# EAGLE board bot4layer (EAGLE 7.6.0)
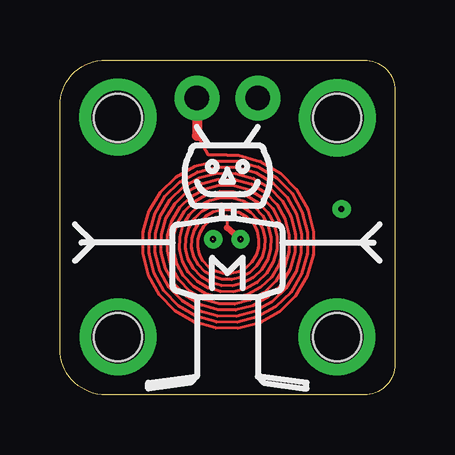
[diagram p0: board, top side]
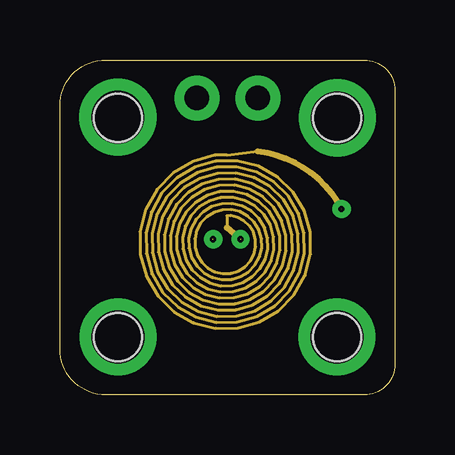
[diagram p1: board, inner layer Route2]
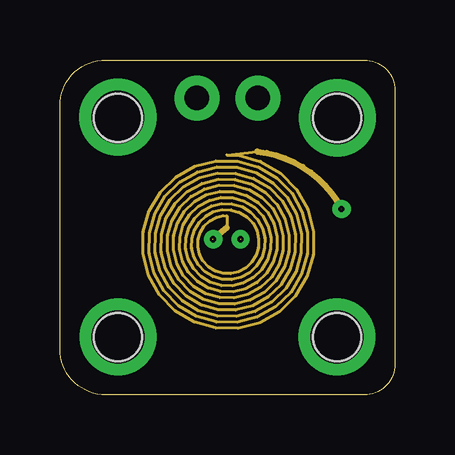
[diagram p2: board, inner layer Route3]
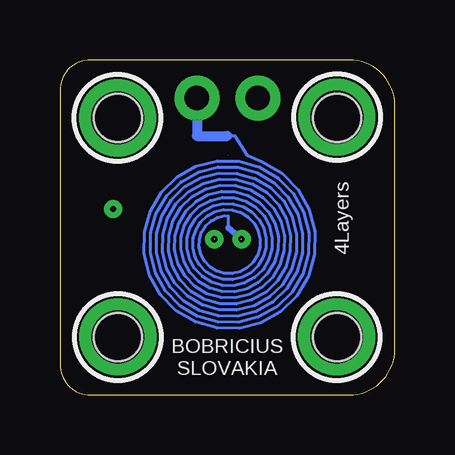
[diagram p3: board, bottom side, seen from below]

Size 13.97 x 13.97 mm. Coordinates in mm from the lower left corner, seen from the top.
Outline: 1.9,0 arc-90 0,1.91 0,12.06 arc-90 1.9,13.97 12.7,13.97 arc-90 13.97,12.7 13.97,1.27 arc-90 12.7,0 1.9,0
Copper layers (1+2+3+16): Top 0.0356mm / dielectric 1.5011mm / Route2 0.0356mm / dielectric 0.1499mm / Route3 0.0356mm / dielectric 0.2007mm / Bottom 0.0356mm
Design rules "LaenPCBOrder *": minimum track width 6mil, minimum drill 13mil, track to track 6mil, track to pad 6mil, pad to pad 6mil, via to via 6mil, smd to smd 6mil, copper to edge 15mil, drill to drill 6mil, minimum pad ring 7mil, minimum via ring 7mil, stop-mask expansion 4mil, vias tented up to drill 300mil, thermal gap 10mil
Net classes: 0 default: width 0.381 mm, drill 0.381 mm, clearance 0.305 mm; 1 GND: width 0.508 mm, drill 0.381 mm, clearance 0.305 mm; 2 pwr: width 0.508 mm, drill 0.381 mm, clearance 0.305 mm
Holes 2 mm at 2.41,2.41 2.41,11.56 11.56,2.41 11.56,11.56

## Footprints (pad centres in the part's own frame; a part is rotated, then mirrored left to right if it is on the bottom)
1X02_NO_SILK = drill 1.016 pad 1.88: 1 0,0; 2 2.54,0
MOUNTINGHOLE_2.0_PLATED = drill 2.2 pad 3: P$1 0,0

## Placement (x,y rotation side)
J1  [1X02_NO_SILK]  8.26,12.38 180 top
U$1  MOUNTINGHOLE2.0  [MOUNTINGHOLE_2.0_PLATED]  2.41,11.58 90 bottom
U$2  MOUNTINGHOLE2.0  [MOUNTINGHOLE_2.0_PLATED]  11.57,11.56 90 bottom
U$3  MOUNTINGHOLE2.0  [MOUNTINGHOLE_2.0_PLATED]  11.56,2.41 90 bottom
U$7  MOUNTINGHOLE2.0  [MOUNTINGHOLE_2.0_PLATED]  2.43,2.41 90 bottom

## Library data of the parts
J1 = SparkFun-Connectors
U$1-U$3 U$7 = microbuilder; BOM: EXCLUDE

## Nets
L4: J1.1 J1.2

## Tracks (layer width: path | path; a pad name or v marks a point on that pad's centre or on a via)
L4  (via drill 0.25 pad 0.76)  (6 unrouted)
  Top 0.127: 6.96,6.98 6.96,7.46 6.81,7.47 6.51,7.4 6.24,7.26 6.02,7.05 5.85,6.79 5.76,6.49 5.75,6.17 5.82,5.86 5.98,5.58 6.2,5.34 6.48,5.17 6.79,5.07 7.13,5.06 7.45,5.14 7.75,5.3 8,5.53 8.18,5.82 8.28,6.16 8.29,6.5 8.21,6.85 8.04,7.16 7.8,7.42 7.49,7.61 7.14,7.72 6.77,7.73 6.41,7.64 6.09,7.46 5.82,7.21 5.62,6.88 5.51,6.52 5.5,6.14 5.59,5.76 5.77,5.42 6.04,5.14 6.38,4.93 6.76,4.82 7.16,4.81 7.55,4.9 7.91,5.09 8.2,5.37 8.42,5.73 8.54,6.12 8.54,6.54 8.45,6.95 8.24,7.32 7.95,7.62 7.59,7.85 7.17,7.97 6.74,7.98 6.32,7.88 5.93,7.67 5.61,7.36 5.38,6.98 5.26,6.55 5.24,6.1 5.35,5.66 5.57,5.26 5.89,4.93 6.28,4.69 6.73,4.56 7.19,4.55 7.65,4.66 8.06,4.89 8.41,5.22 8.65,5.63 8.79,6.09 8.8,6.57 8.68,7.04 8.45,7.47 8.11,7.83 7.68,8.08 7.21,8.22 6.71,8.23 6.22,8.11 5.78,7.87 5.41,7.52 5.14,7.08 5,6.59 4.99,6.07 5.12,5.56 5.37,5.11 5.73,4.73 6.18,4.45 6.69,4.31 7.23,4.3 7.75,4.43 8.22,4.69 8.61,5.06 8.89,5.53 9.04,6.05 9.05,6.61 8.92,7.14 8.65,7.63 8.26,8.03 7.78,8.32 7.24,8.48 6.67,8.49 6.12,8.35 5.62,8.07 5.21,7.67 4.91,7.18 4.75,6.62 4.74,6.04 4.88,5.47 5.16,4.95 5.57,4.53 6.09,4.22 6.66,4.05 7.26,4.04 7.84,4.19 8.37,4.48 8.81,4.91 9.13,5.43 9.3,6.02 9.31,6.64 9.16,7.24 8.85,7.78 8.42,8.23 7.88,8.56 7.27,8.73 6.64,8.74 6.02,8.59 5.46,8.28 5,7.83 4.67,7.28 4.49,6.65 4.48,6 4.64,5.37 4.96,4.8 5.42,4.32 5.99,3.98 6.63,3.8 7.29,3.79 7.94,3.95 8.53,4.28 9.02,4.75 9.36,5.33 9.55,5.99 9.56,6.67 9.39,7.34 9.06,7.94 8.58,8.44 7.98,8.79 7.31,8.98 6.61,9 5.93,8.82 5.31,8.48 4.8,7.99 4.43,7.37 4.24,6.69 4.23,5.97 4.4,5.27 4.76,4.64 5.26,4.12 5.89,3.75 6.59,3.55 7.33,3.53 8.04,3.72 8.69,4.08 9.22,4.59 9.6,5.23 9.8,5.95 9.82,6.7 9.63,7.44 9.26,8.1 8.73,8.64 8.08,9.03 7.34,9.24 6.57,9.25 5.83,9.06 5.15,8.68 4.6,8.14 4.2,7.47 3.98,6.72 3.98,5.94 4.17,5.17 4.55,4.48 5.11,3.92 5.79,3.51 6.56,3.29 7.36,3.28 8.14,3.48 8.84,3.87 9.42,4.44 9.84,5.14 10.06,5.92 10.07,6.74 9.87,7.53 9.46,8.25 8.89,8.84 8.18,9.27 7.37,9.49 6.54,9.5 5.73,9.3 5,8.89 4.39,8.3 3.96,7.57 3.73,6.75 3.72,5.9 3.93,5.08 4.35,4.33 4.95,3.71 5.69,3.27 6.52,3.04 7.39,3.03 8.24,3.24 9,3.67 9.63,4.28 10.07,5.04 10.31,5.89 10.32,6.77 10.1,7.63 9.67,8.41 9.04,9.05 8.27,9.5 7.41,9.75 6.51,9.76 5.63,9.53 4.84,9.09 4.19,8.45 3.72,7.67 3.48,6.79 3.47,5.87 3.7,4.98 4.15,4.17 4.79,3.51 5.59,3.03 6.49,2.78 7.43,2.77 8.34,3.01 9.15,3.47 9.83,4.13 10.31,4.94 10.57,5.85 10.58,6.81 10.34,7.73 9.87,8.56 9.2,9.25 8.37,9.74 7.44,10 6.96,10.01 6.2,10.01 5.75,10.79 5.71,10.8
  Top 0.254: 6.96,6.98 v7.53,6.49
  Top 0.406: J1.2 5.71,10.8
  Route2 0.127: 6.96,6.98 6.96,7.46 7.11,7.47 7.4,7.4 7.67,7.26 7.9,7.05 8.06,6.79 8.15,6.49 8.16,6.17 8.09,5.86 7.94,5.58 7.72,5.34 7.44,5.17 7.12,5.07 6.79,5.06 6.46,5.14 6.17,5.3 5.92,5.53 5.74,5.82 5.64,6.16 5.63,6.5 5.71,6.85 5.87,7.16 6.12,7.42 6.43,7.61 6.78,7.72 7.14,7.73 7.5,7.64 7.83,7.46 8.1,7.21 8.3,6.88 8.41,6.52 8.42,6.14 8.33,5.76 8.14,5.42 7.87,5.14 7.54,4.93 7.16,4.82 6.76,4.81 6.37,4.9 6.01,5.09 5.71,5.37 5.5,5.73 5.38,6.12 5.37,6.54 5.47,6.95 5.67,7.32 5.96,7.62 6.33,7.85 6.74,7.97 7.18,7.98 7.6,7.88 7.98,7.67 8.3,7.36 8.54,6.98 8.66,6.55 8.67,6.1 8.57,5.66 8.35,5.26 8.03,4.93 7.64,4.69 7.19,4.56 6.73,4.55 6.27,4.66 5.85,4.89 5.51,5.22 5.26,5.63 5.13,6.09 5.12,6.57 5.23,7.04 5.47,7.47 5.81,7.83 6.23,8.08 6.71,8.22 7.21,8.23 7.7,8.11 8.14,7.87 8.51,7.52 8.77,7.08 8.92,6.59 8.93,6.07 8.8,5.56 8.55,5.11 8.19,4.73 7.73,4.45 7.23,4.31 6.69,4.3 6.17,4.43 5.7,4.69 5.31,5.06 5.03,5.53 4.87,6.05 4.86,6.61 5,7.14 5.26,7.63 5.65,8.03 6.13,8.32 6.68,8.48 7.24,8.49 7.8,8.35 8.3,8.07 8.71,7.67 9.01,7.18 9.17,6.62 9.18,6.04 9.04,5.47 8.75,4.95 8.34,4.53 7.83,4.22 7.26,4.05 6.66,4.04 6.07,4.19 5.54,4.48 5.1,4.91 4.79,5.43 4.62,6.02 4.61,6.64 4.76,7.24 5.06,7.78 5.5,8.23 6.04,8.56 6.64,8.73 7.28,8.74 7.89,8.59 8.45,8.28 8.91,7.83 9.25,7.28 9.42,6.65 9.43,6 9.28,5.37 8.96,4.8 8.5,4.32 7.93,3.98 7.29,3.8 6.62,3.79 5.97,3.95 5.39,4.28 4.9,4.75 4.55,5.33 4.37,5.99 4.36,6.67 4.52,7.34 4.86,7.94 5.34,8.44 5.94,8.79 6.61,8.98 7.31,9 7.99,8.82 8.61,8.48 9.12,7.99 9.48,7.37 9.68,6.69 9.69,5.97 9.51,5.27 9.16,4.64 8.65,4.12 8.03,3.75 7.32,3.55 6.59,3.53 5.88,3.72 5.23,4.08 4.7,4.59 4.32,5.23 4.11,5.95 4.1,6.7 4.29,7.44 4.65,8.1 5.18,8.64 5.84,9.03 6.57,9.24 7.34,9.25 8.09,9.06 8.76,8.68 9.32,8.14 9.72,7.47 9.93,6.72 9.94,5.94 9.75,5.17 9.36,4.48 8.81,3.92 8.13,3.51 7.36,3.29 6.56,3.28 5.78,3.48 5.07,3.87 4.49,4.44 4.08,5.14 3.86,5.92 3.85,6.74 4.05,7.53 4.45,8.25 5.03,8.84 5.74,9.27 6.54,9.49 7.38,9.5 8.19,9.3 8.92,8.89 9.52,8.3 9.96,7.57 10.19,6.75 10.2,5.9 9.99,5.08 9.57,4.33 8.97,3.71 8.23,3.27 7.39,3.04 6.52,3.03 5.68,3.24 4.92,3.67 4.29,4.28 3.84,5.04 3.6,5.89 3.59,6.77 3.81,7.63 4.25,8.41 4.87,9.05 5.64,9.5 6.51,9.75 7.41,9.76 8.29,9.53 9.08,9.09 9.73,8.45 10.19,7.67 10.44,6.79 10.45,5.87 10.22,4.98 9.77,4.17 9.12,3.51 8.32,3.03 7.43,2.78 6.49,2.77 5.58,3.01 4.76,3.47 4.09,4.13 3.61,4.94 3.35,5.85 3.34,6.81 3.58,7.73 4.05,8.56 4.72,9.25 5.54,9.74 6.48,10 6.96,10.01 8.26,10.16
  Route2 0.254: 6.96,6.98 v7.53,6.49 | 8.26,10.16 arc-56 v11.75,7.75
  Route3 0.127: 6.96,6.98 6.96,7.46 6.81,7.47 6.51,7.4 6.24,7.26 6.02,7.05 5.85,6.79 5.76,6.49 5.75,6.17 5.82,5.86 5.98,5.58 6.2,5.34 6.48,5.17 6.79,5.07 7.13,5.06 7.45,5.14 7.75,5.3 8,5.53 8.18,5.82 8.28,6.16 8.29,6.5 8.21,6.85 8.04,7.16 7.8,7.42 7.49,7.61 7.14,7.72 6.77,7.73 6.41,7.64 6.09,7.46 5.82,7.21 5.62,6.88 5.51,6.52 5.5,6.14 5.59,5.76 5.77,5.42 6.04,5.14 6.38,4.93 6.76,4.82 7.16,4.81 7.55,4.9 7.91,5.09 8.2,5.37 8.42,5.73 8.54,6.12 8.54,6.54 8.45,6.95 8.24,7.32 7.95,7.62 7.59,7.85 7.17,7.97 6.74,7.98 6.32,7.88 5.93,7.67 5.61,7.36 5.38,6.98 5.26,6.55 5.24,6.1 5.35,5.66 5.57,5.26 5.89,4.93 6.28,4.69 6.73,4.56 7.19,4.55 7.65,4.66 8.06,4.89 8.41,5.22 8.65,5.63 8.79,6.09 8.8,6.57 8.68,7.04 8.45,7.47 8.11,7.83 7.68,8.08 7.21,8.22 6.71,8.23 6.22,8.11 5.78,7.87 5.41,7.52 5.14,7.08 5,6.59 4.99,6.07 5.12,5.56 5.37,5.11 5.73,4.73 6.18,4.45 6.69,4.31 7.23,4.3 7.75,4.43 8.22,4.69 8.61,5.06 8.89,5.53 9.04,6.05 9.05,6.61 8.92,7.14 8.65,7.63 8.26,8.03 7.78,8.32 7.24,8.48 6.67,8.49 6.12,8.35 5.62,8.07 5.21,7.67 4.91,7.18 4.75,6.62 4.74,6.04 4.88,5.47 5.16,4.95 5.57,4.53 6.09,4.22 6.66,4.05 7.26,4.04 7.84,4.19 8.37,4.48 8.81,4.91 9.13,5.43 9.3,6.02 9.31,6.64 9.16,7.24 8.85,7.78 8.42,8.23 7.88,8.56 7.27,8.73 6.64,8.74 6.02,8.59 5.46,8.28 5,7.83 4.67,7.28 4.49,6.65 4.48,6 4.64,5.37 4.96,4.8 5.42,4.32 5.99,3.98 6.63,3.8 7.29,3.79 7.94,3.95 8.53,4.28 9.02,4.75 9.36,5.33 9.55,5.99 9.56,6.67 9.39,7.34 9.06,7.94 8.58,8.44 7.98,8.79 7.31,8.98 6.61,9 5.93,8.82 5.31,8.48 4.8,7.99 4.43,7.37 4.24,6.69 4.23,5.97 4.4,5.27 4.76,4.64 5.26,4.12 5.89,3.75 6.59,3.55 7.33,3.53 8.04,3.72 8.69,4.08 9.22,4.59 9.6,5.23 9.8,5.95 9.82,6.7 9.63,7.44 9.26,8.1 8.73,8.64 8.08,9.03 7.34,9.24 6.57,9.25 5.83,9.06 5.15,8.68 4.6,8.14 4.2,7.47 3.98,6.72 3.98,5.94 4.17,5.17 4.55,4.48 5.11,3.92 5.79,3.51 6.56,3.29 7.36,3.28 8.14,3.48 8.84,3.87 9.42,4.44 9.84,5.14 10.06,5.92 10.07,6.74 9.87,7.53 9.46,8.25 8.89,8.84 8.18,9.27 7.37,9.49 6.54,9.5 5.73,9.3 5,8.89 4.39,8.3 3.96,7.57 3.73,6.75 3.72,5.9 3.93,5.08 4.35,4.33 4.95,3.71 5.69,3.27 6.52,3.04 7.39,3.03 8.24,3.24 9,3.67 9.63,4.28 10.07,5.04 10.31,5.89 10.32,6.77 10.1,7.63 9.67,8.41 9.04,9.05 8.27,9.5 7.41,9.75 6.51,9.76 5.63,9.53 4.84,9.09 4.19,8.45 3.72,7.67 3.48,6.79 3.47,5.87 3.7,4.98 4.15,4.17 4.79,3.51 5.59,3.03 6.49,2.78 7.43,2.77 8.34,3.01 9.15,3.47 9.83,4.13 10.31,4.94 10.57,5.85 10.58,6.81 10.34,7.73 9.87,8.56 9.2,9.25 8.37,9.74 7.44,10 6.96,10.01 8.23,10.15
  Route3 0.254: 6.96,6.98 v6.39,6.49 | 8.23,10.15 arc-57 v11.75,7.75
  Bottom 0.127: 6.96,6.98 6.96,7.46 7.11,7.47 7.4,7.4 7.67,7.26 7.9,7.05 8.06,6.79 8.15,6.49 8.16,6.17 8.09,5.86 7.94,5.58 7.72,5.34 7.44,5.17 7.12,5.07 6.79,5.06 6.46,5.14 6.17,5.3 5.92,5.53 5.74,5.82 5.64,6.16 5.63,6.5 5.71,6.85 5.87,7.16 6.12,7.42 6.43,7.61 6.78,7.72 7.14,7.73 7.5,7.64 7.83,7.46 8.1,7.21 8.3,6.88 8.41,6.52 8.42,6.14 8.33,5.76 8.14,5.42 7.87,5.14 7.54,4.93 7.16,4.82 6.76,4.81 6.37,4.9 6.01,5.09 5.71,5.37 5.5,5.73 5.38,6.12 5.37,6.54 5.47,6.95 5.67,7.32 5.96,7.62 6.33,7.85 6.74,7.97 7.18,7.98 7.6,7.88 7.98,7.67 8.3,7.36 8.54,6.98 8.66,6.55 8.67,6.1 8.57,5.66 8.35,5.26 8.03,4.93 7.64,4.69 7.19,4.56 6.73,4.55 6.27,4.66 5.85,4.89 5.51,5.22 5.26,5.63 5.13,6.09 5.12,6.57 5.23,7.04 5.47,7.47 5.81,7.83 6.23,8.08 6.71,8.22 7.21,8.23 7.7,8.11 8.14,7.87 8.51,7.52 8.77,7.08 8.92,6.59 8.93,6.07 8.8,5.56 8.55,5.11 8.19,4.73 7.73,4.45 7.23,4.31 6.69,4.3 6.17,4.43 5.7,4.69 5.31,5.06 5.03,5.53 4.87,6.05 4.86,6.61 5,7.14 5.26,7.63 5.65,8.03 6.13,8.32 6.68,8.48 7.24,8.49 7.8,8.35 8.3,8.07 8.71,7.67 9.01,7.18 9.17,6.62 9.18,6.04 9.04,5.47 8.75,4.95 8.34,4.53 7.83,4.22 7.26,4.05 6.66,4.04 6.07,4.19 5.54,4.48 5.1,4.91 4.79,5.43 4.62,6.02 4.61,6.64 4.76,7.24 5.06,7.78 5.5,8.23 6.04,8.56 6.64,8.73 7.28,8.74 7.89,8.59 8.45,8.28 8.91,7.83 9.25,7.28 9.42,6.65 9.43,6 9.28,5.37 8.96,4.8 8.5,4.32 7.93,3.98 7.29,3.8 6.62,3.79 5.97,3.95 5.39,4.28 4.9,4.75 4.55,5.33 4.37,5.99 4.36,6.67 4.52,7.34 4.86,7.94 5.34,8.44 5.94,8.79 6.61,8.98 7.31,9 7.99,8.82 8.61,8.48 9.12,7.99 9.48,7.37 9.68,6.69 9.69,5.97 9.51,5.27 9.16,4.64 8.65,4.12 8.03,3.75 7.32,3.55 6.59,3.53 5.88,3.72 5.23,4.08 4.7,4.59 4.32,5.23 4.11,5.95 4.1,6.7 4.29,7.44 4.65,8.1 5.18,8.64 5.84,9.03 6.57,9.24 7.34,9.25 8.09,9.06 8.76,8.68 9.32,8.14 9.72,7.47 9.93,6.72 9.94,5.94 9.75,5.17 9.36,4.48 8.81,3.92 8.13,3.51 7.36,3.29 6.56,3.28 5.78,3.48 5.07,3.87 4.49,4.44 4.08,5.14 3.86,5.92 3.85,6.74 4.05,7.53 4.45,8.25 5.03,8.84 5.74,9.27 6.54,9.49 7.38,9.5 8.19,9.3 8.92,8.89 9.52,8.3 9.96,7.57 10.19,6.75 10.2,5.9 9.99,5.08 9.57,4.33 8.97,3.71 8.23,3.27 7.39,3.04 6.52,3.03 5.68,3.24 4.92,3.67 4.29,4.28 3.84,5.04 3.6,5.89 3.59,6.77 3.81,7.63 4.25,8.41 4.87,9.05 5.64,9.5 6.51,9.75 7.41,9.76 8.29,9.53 9.08,9.09 9.73,8.45 10.19,7.67 10.44,6.79 10.45,5.87 10.22,4.98 9.77,4.17 9.12,3.51 8.32,3.03 7.43,2.78 6.49,2.77 5.58,3.01 4.76,3.47 4.09,4.13 3.61,4.94 3.35,5.85 3.34,6.81 3.58,7.73 4.05,8.56 4.72,9.25 5.54,9.74 6.16,10 6.67,10.8 6.98,10.8
  Bottom 0.254: 6.96,6.98 v6.39,6.49
  Bottom 0.406: J1.1 8.26,10.8 6.98,10.8

## Text on the board
bNames: 4Layers | BOBRICIUS / SLOVAKIA